# Altium PCB TD3_TP2_Entradas Analogicas.PcbDoc
Units mm, origin at the board's own origin, x right, y up, seen from the top; angles counter-clockwise.
Board outline 81.28 x 57.15 mm, 2 copper layers (Top Layer, Bottom Layer); 30 components, 15 nets, 68 pads, 0 vias.
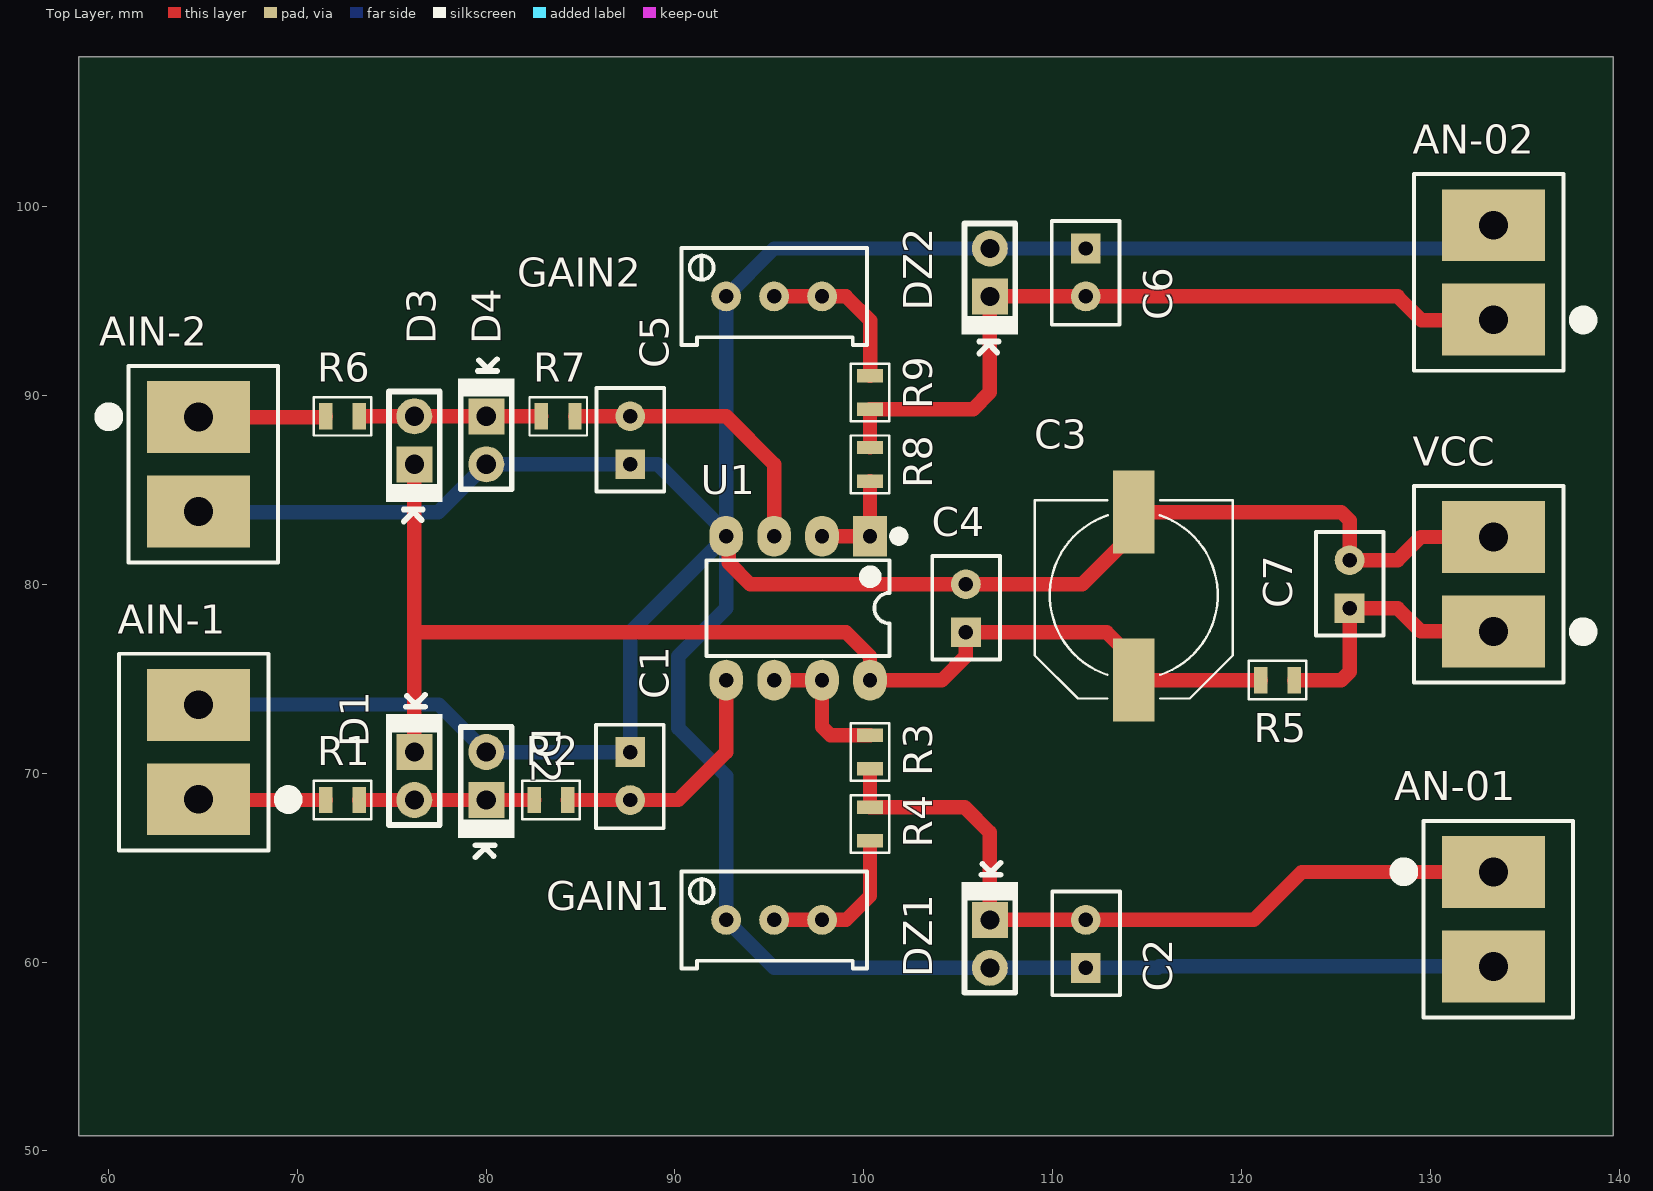
[diagram p0: Top Layer view]
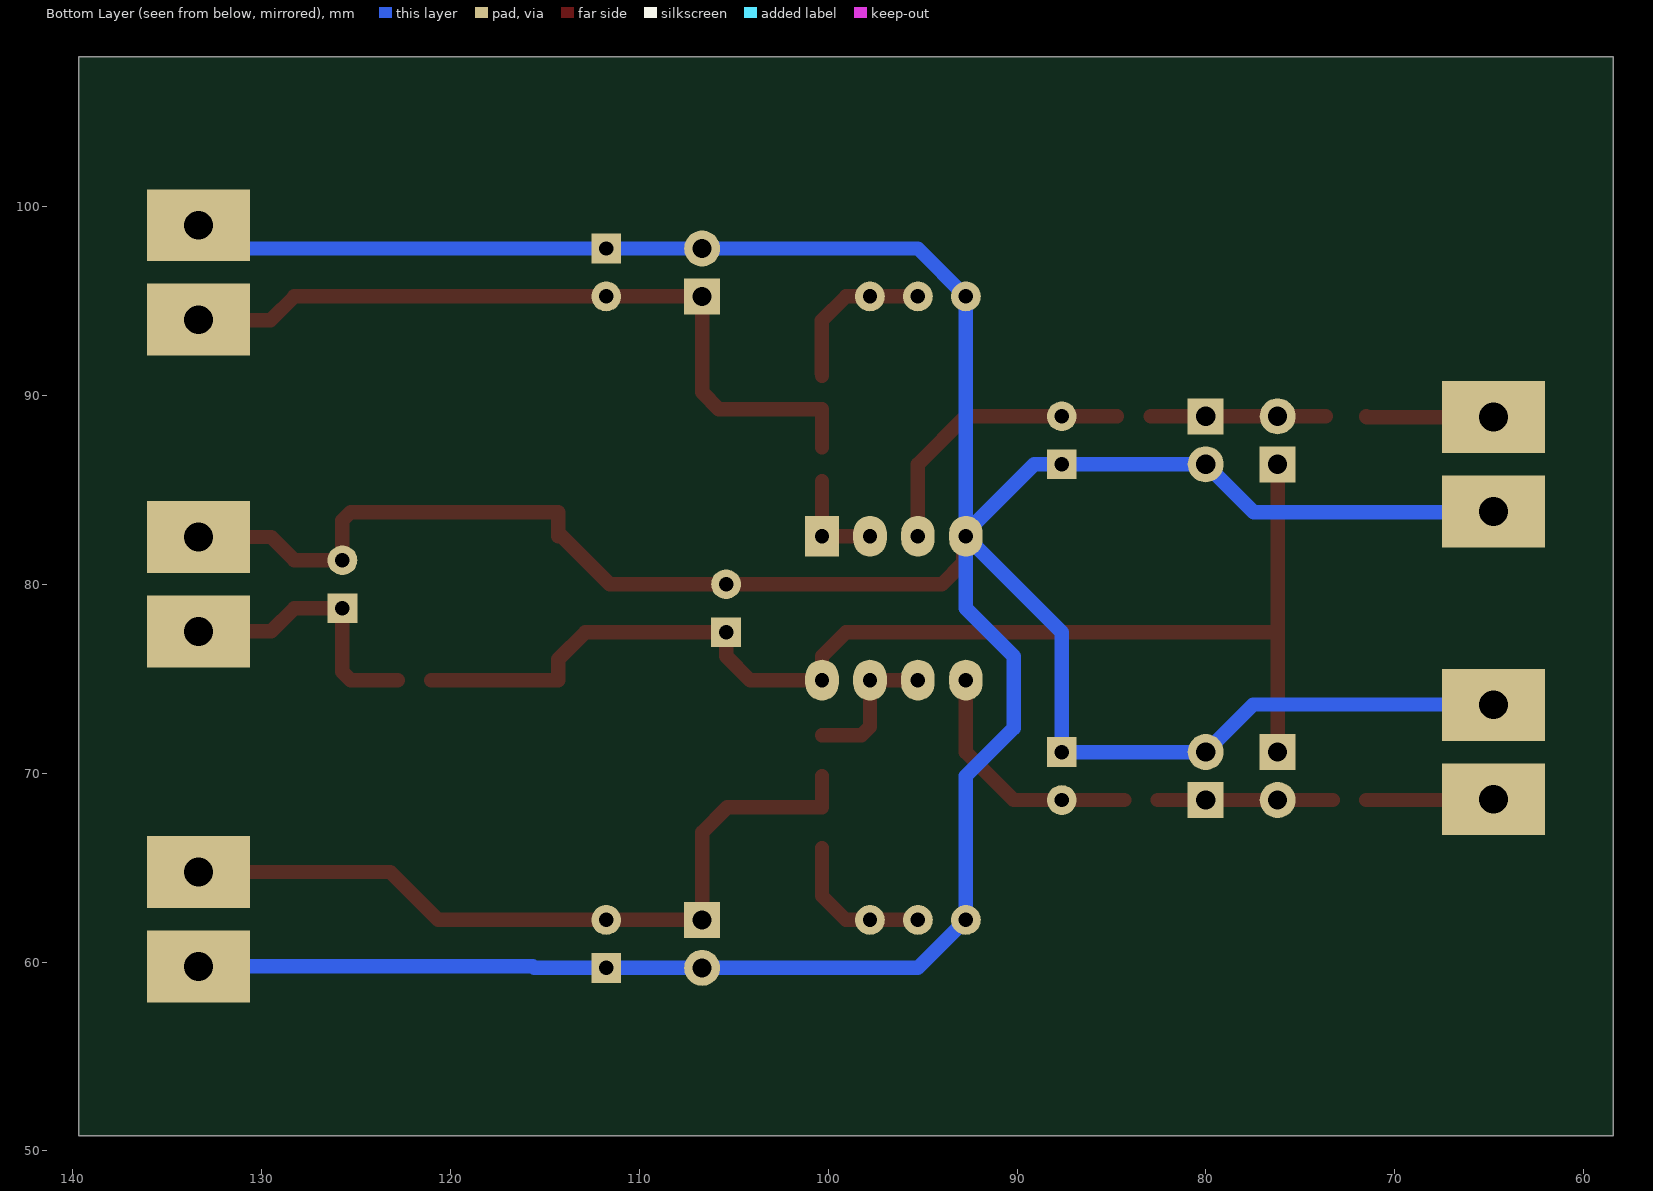
[diagram p1: Bottom Layer view, seen from below]
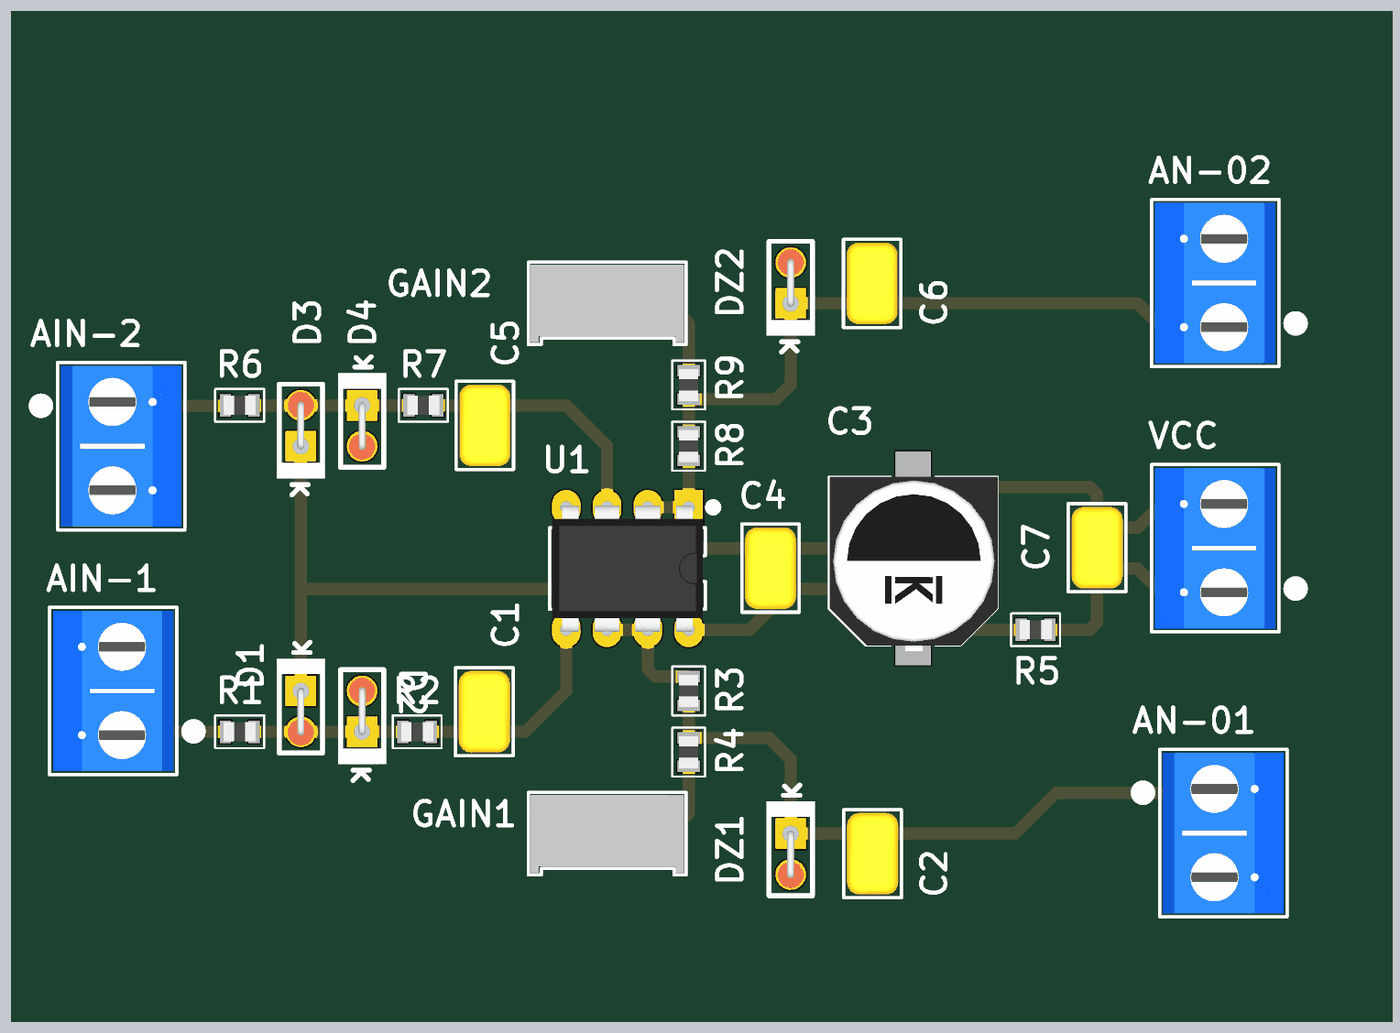
[diagram p2: 3D render of the assembled board from above, using the file's embedded part models]

## Layer stack, top to bottom
Top Solder: solder mask 0.0102, Solder Resist, Dk 3.5
Top Layer: signal copper 0.0356
Dielectric 1: dielectric 0.32, FR-4, Dk 4.8
Bottom Layer: signal copper 0.0356
Bottom Solder: solder mask 0.0102, Solder Resist, Dk 3.5

## Board outline
58.42,50.8 58.42,107.95 139.7,107.95 139.7,50.8

## Design rules (kind name [scope] priority, off if disabled: settings)
Clearance [All] p1: gap=0.254 ignorepadtopadclearanceinfootprint=FALSE
PolygonConnect [All] p1: connectstyle=Relief reliefconductorwidth=0.254 reliefentries=4 polygonreliefangle="90 Angle" airgapwidth=0.254
RoutingVias [All] p1: holewidth=0.711 width=1.27 viastyle="Through Hole" minholewidth=0.711 minwidth=1.27 maxholewidth=0.711 maxwidth=1.27
SolderMaskExpansion [All] p1: expansion=0.102 istentingtop=FALSE
Width [All] p1: maxlimit=5.08 minlimit=0.254 preferedwidth=0.254
30 further rules are at their usual default settings.

## Components (designator, comment, footprint, x,y, rotation, side; value= is the part's Value field where it differs from the comment)
AIN-1 "CONN_2" BORNERA_2 64.77,71.12 r90 top
AIN-2 "CONN_2" BORNERA_2 64.77,86.36 r270 top
AN-01 "CONN_2" BORNERA_2 133.35,62.27 r270 top
AN-02 "CONN_2" BORNERA_2 133.35,96.52 r90 top
C1 "330pF" CAP_0.1_V 87.63,69.85 r270 top
C2 "1nF" CAP_0.1_V 111.76,60.96 r90 top
C3 "10uFx16V" CAP_AL_10x12.7mm 114.3,74.93 r90 top
C4 "100nF" CAP_0.1_V 105.41,78.74 r90 top
C5 "330pF" CAP_0.1_V 87.63,87.63 r90 top
C6 "1nF" CAP_0.1_V 111.76,96.52 r270 top
C7 "100nF" CAP_0.1_V 125.73,80.01 r90 top
D1 "1N4148" DIODE_0.1_V 76.2,69.85 r90 top
D2 "1N4148" DIODE_0.1_V 80.01,69.85 r270 top
D3 "1N4148" DIODE_0.1_V 76.2,87.63 r270 top
D4 "1N4148" DIODE_0.1_V 80.01,87.63 r90 top
DZ1 "3V3" DIODE_0.1_V 106.68,60.96 r90 top
DZ2 "3V3" DIODE_0.1_V 106.68,96.52 r270 top
GAIN1 "10k" "TRIMPOT 3296W" 95.25,62.23 r90 top
GAIN2 "10k" "TRIMPOT 3296W" 95.25,95.25 r90 top
R1 "10k" "RESISTOR 0805" 72.39,68.58 r180 top
R2 "100k" "RESISTOR 0805" 83.439,68.58 r180 top
R3 "10k" "RESISTOR 0805" 100.33,71.12 r90 top
R4 "15k" "RESISTOR 0805" 100.33,67.31 r270 top
R5 "100R" "RESISTOR 0805" 121.92,74.93 r0 top
R6 "10k" "RESISTOR 0805" 72.39,88.9 r180 top
R7 "100k" "RESISTOR 0805" 83.82,88.9 r180 top
R8 "10k" "RESISTOR 0805" 100.33,86.36 r270 top
R9 "15k" "RESISTOR 0805" 100.33,90.17 r90 top
U1 "RRIO" DIP_8_300 96.52,78.74 r270 top
VCC "CONN_2" BORNERA_2 133.35,80.01 r90 top

## Footprints (in the part's own frame and the unit in brackets; to place one, negate y for a bottom-side part, rotate by r counter-clockwise, add the part's x,y. Pads: shape width x height; smd on the part's side, far side on the other; paste and mask are expansions set on the pad)
BORNERA_2 [mil] "BORNERA 2 PINES - PITCH 5mm - ALTURA 9.5mm"
  rect 150x215 hole 60: 1(-98.43,0) 2(98.43,0)
  silkscreen extent -205,-202 205,166, body extent -197,-138 197,157, height 394
CAP_0.1_V [mil] "CAPACITOR 100 mils - VERTICAL"
  rect 62x62 hole 30: 1(-50,0)
  round 62 hole 30: 2(50,0)
  silkscreen extent -107,-71 109,70, body extent -99,-63 101,62, height 390
CAP_AL_10x12.7mm [mm]
  rect 4.4x2.2 smd paste-2539.97: 1(0,0) 2(8.9,0)
  silkscreen extent -0.97,-5.25 9.53,5.25, body extent -1.33,-5.29 9.87,5.21, height 12.5
DIODE_0.1_V [mil] "DIODO AXIAL 100 mils - VERTICAL"
  round 75 hole 40: 1(-50,0)
  rect 75x75 hole 40: 2(50,0)
  silkscreen extent -102,-59 169,59, body extent -83,-32 57,32, height 207
DIP_8_300 [mil] "DIP 8 - ANCHO 300 MILS - ALTURA 5.08mm - PITCH 2.54mm"
  rect 85x70 hole 30: 1(-150,150)
  oval 85x70 hole 30: 2(-150,50) 3(-150,-50) 4(-150,-150) 5(150,-150) 6(150,-50) 7(150,50) 8(150,150)
  silkscreen extent -160,-191 100,220, body extent -155,-185 155,185, height 174
"RESISTOR 0805" [mil]
  rect 28x55 smd: 1(-35,0) 2(35,0)
  silkscreen extent -60,-40 60,40, body extent -39,-24 39,24, height 28
"TRIMPOT 3296W" [mil] "TRIMPOT 3296W - ALTURA 10mm"
  round 62 hole 30: 1(0,-100) 2(0,0) 3(0,100)
  silkscreen extent -101,-194 101,193, body extent -95,-188 95,187, height 456

## Part data
AIN-1 AIN-2 AN-01 AN-02 VCC: "CONECTOR SMD 2 PINES", COMPONENTE=CONECTOR, MONTAJE=SMD
C1 C2 C4 C5 C6 C7: library part "CAPACITOR NP", COMPONENTE=CAPACITOR
C3: library part CAP_ELECTR_0, "Capacitor 10uF 16V tantalum chip capacitor smd case B", CLASE=1, CODIGO=8584, DESCRIPCION="Capacitor 10uF 16V tantalum chip capacitor smd case B", ENCAPSULADO=SMD, VERSION=0
D1 D2 D3 D4: library part "DIODE SCHOTTKY"
DZ1 DZ2: library part "DIODE ZENER", "DIODO ZENER", COMPONENTE="DIODO ZENER"
GAIN1 GAIN2: library part TRIMPOT, COMPONENTE=TRIMPOT, MONTAJE=SMD
R1 R2 R3 R4 R6 R7 R8 R9: library part RESISTOR, Tolerancia=1%, COMPONENTE=RESISTOR
R5: library part RESISTOR, COMPONENTE=RESISTOR
U1: library part OPAMP_DOBLE

## Nets (pads, with @x,y where several pads share a name; then routed paths per layer and width w, separated by ;. In a path a pad name is that pad's centre, name@x,y a point inside that pad or via, vN(x,y) a via of type N, cw(c..) or ccw(c..) an arc to the next point about the centre after c; other vN are vias at no path point)
+5V: C7.1 R5.2 VCC.1 | length 14.6
  Top Layer w0.762: R5.2 125.284,74.93 125.73,75.376 C7.1 128.27,78.74 129.5,77.51 VCC.1
+5V/2: C3.1 C4.1 D1.2 D3.2 R5.1 U1.8 | length 65.4
  Top Layer w0.762: D1.2 76.2,77.47 ; D3.2 76.2,77.47 ; U1.8@100.284,74.875 100.33,74.921 U1.8 ; R5.1 C3.1 114.3,76.03 112.86,77.47 C4.1 105.41,76.2 104.14,74.93 U1.8 ; 76.2,77.47 99.06,77.47 100.33,76.2 U1.8
GND: AIN-1.2 AIN-2.2 AN-01.2 AN-02.2 C1.1 C2.1 C3.2 C4.2 C5.1 C6.1 C7.2 D2.1 D4.1 DZ1.1 DZ2.1 GAIN1.3 GAIN2.3 U1.4 VCC.2 | length 234.6
  Top Layer w0.762: U1.4 92.845,82.415 92.845,81.145 93.98,80.01 C4.2 111.58,80.01 C3.2@114.3,82.73 ; C3.2@114.3,82.55 C3.2 125.284,83.83 125.73,83.384 C7.2 128.27,81.28 129.5,82.51 VCC.2
  Bottom Layer w0.762: AIN-1.2 AIN-1.2@64.77,73.64 ; AIN-1.2@64.77,73.66 AIN-1.2@64.77,73.64 ; AIN-2.2 64.77,83.82 77.47,83.82 D4.1 C5.1 89.09,86.36 U1.4@92.71,82.74 ; D2.1@79.915,71.231 80.01,71.136 D2.1 ; C2.1@111.49,59.69 DZ1.1 95.25,59.69 GAIN1.3 92.71,69.85 90.17,72.39 90.17,76.2 92.71,78.74 U1.4 ; C2.1 115.57,59.69 115.65,59.77 AN-01.2 ; AN-02.2 132.12,97.79 C6.1 DZ2.1 95.25,97.79 GAIN2.3 U1.4@92.71,82.74 ; AIN-1.2@64.77,73.64 77.49,73.64 D2.1 ; D2.1 C1.1 87.63,77.47 U1.4 ; U1.4 U1.4@92.71,82.74
NetAIN-1_1: AIN-1.1 R1.2 | length 6.8
  Top Layer w0.762: AIN-1.1@64.77,68.58 R1.2
  Top Layer w1.27: AIN-1.1@64.77,68.58 AIN-1.1
NetAIN-2_1: AIN-2.1 R6.2 | length 6.8
  Top Layer w0.762: AIN-2.1 71.476,88.86 71.501,88.885 R6.2
NetAN-01_1: AN-01.1 C2.2 DZ1.2 R3.1 R4.1 | length 40.9
  Top Layer w0.762: 100.33,69.85 R4.1 105.345,68.199 106.68,66.864 DZ1.2 C2.2 120.65,62.23 123.19,64.77 AN-01.1
NetAN-02_1: AN-02.1 C6.2 DZ2.2 R8.1 R9.1 | length 41.1
  Top Layer w0.762: R8.1 R9.1 105.791,89.281 106.68,90.17 DZ2.2 C6.2@111.597,95.25 ; C6.2@111.526,95.179 C6.2@111.597,95.25 ; AN-02.1 133.31,93.98 129.54,93.98 128.27,95.25 C6.2 C6.2@111.597,95.25
NetC1_2: C1.2 R2.1 U1.5 | length 13.2
  Top Layer w0.762: R2.1 C1.2 90.17,68.58 92.71,71.12 U1.5
NetC5_2: C5.2 R7.1 U1.3 | length 15.4
  Top Layer w0.762: R7.1 C5.2 92.71,88.9 95.25,86.36 U1.3
NetD1_1: D1.1 D2.2 R1.1 R2.2 | length 9.3
  Top Layer w0.762: R1.1 D1.1 D2.2 R2.2
NetD3_1: D3.1 D4.2 R6.1 R7.2 | length 9.3
  Top Layer w0.762: 73.66,88.9 D3.1 D4.2 R7.2
NetGAIN1_1: GAIN1.1 GAIN1.2 R4.2 | length 8.1
  Top Layer w0.762: GAIN1.2 99.06,62.23 100.33,63.5 100.33,66.04
NetGAIN2_1: GAIN2.1 GAIN2.2 R9.2 | length 8.5
  Top Layer w0.762: GAIN2.2 GAIN2.1 99.06,95.25 100.338,93.972 100.338,91.188 100.33,91.181 R9.2
NetR3_2: R3.2 U1.6 U1.7 | length 7.7
  Top Layer w0.762: U1.6 U1.7 97.79,72.455 98.236,72.009 R3.2
NetR8_2: R8.2 U1.1 U1.2 | length 5.5
  Top Layer w0.762: U1.2 U1.1 R8.2

## Silkscreen, mask and mechanical layers (free items; w line width, h text height)
Board Shape:
  lines w0.254: 59.104,112.573 59.104,113.081 ; 60.628,112.319 59.104,112.827 ; 60.628,113.335 59.104,112.827 ; 92.608,112.827 59.104,112.827 ; 106.879,112.827 140.384,112.827 ; 138.86,112.319 140.384,112.827 ; 138.86,113.335 140.384,112.827 ; 140.384,112.573 140.384,113.081 ; 143.002,52.174 143.51,50.65 ; 143.002,106.276 143.51,107.8 ; 143.256,50.65 143.764,50.65 ; 143.256,107.8 143.764,107.8 ; 143.51,72.09 143.51,50.65 ; 143.51,86.36 143.51,107.8 ; 144.018,52.174 143.51,50.65 ; 144.018,106.276 143.51,107.8
  lines w0.5: 58.42,50.8 139.7,50.8 139.7,107.95 58.42,107.95 58.42,50.8
  text "81.28 (mm)" at 92.862,111.912 h1.52
  text "57.15 (mm)" at 144.424,72.344 h1.52 r90